# EAGLE board Circuit_board_PCB_(1.2.4)_stage_1_version_2_v4 (EAGLE 9.7.0)
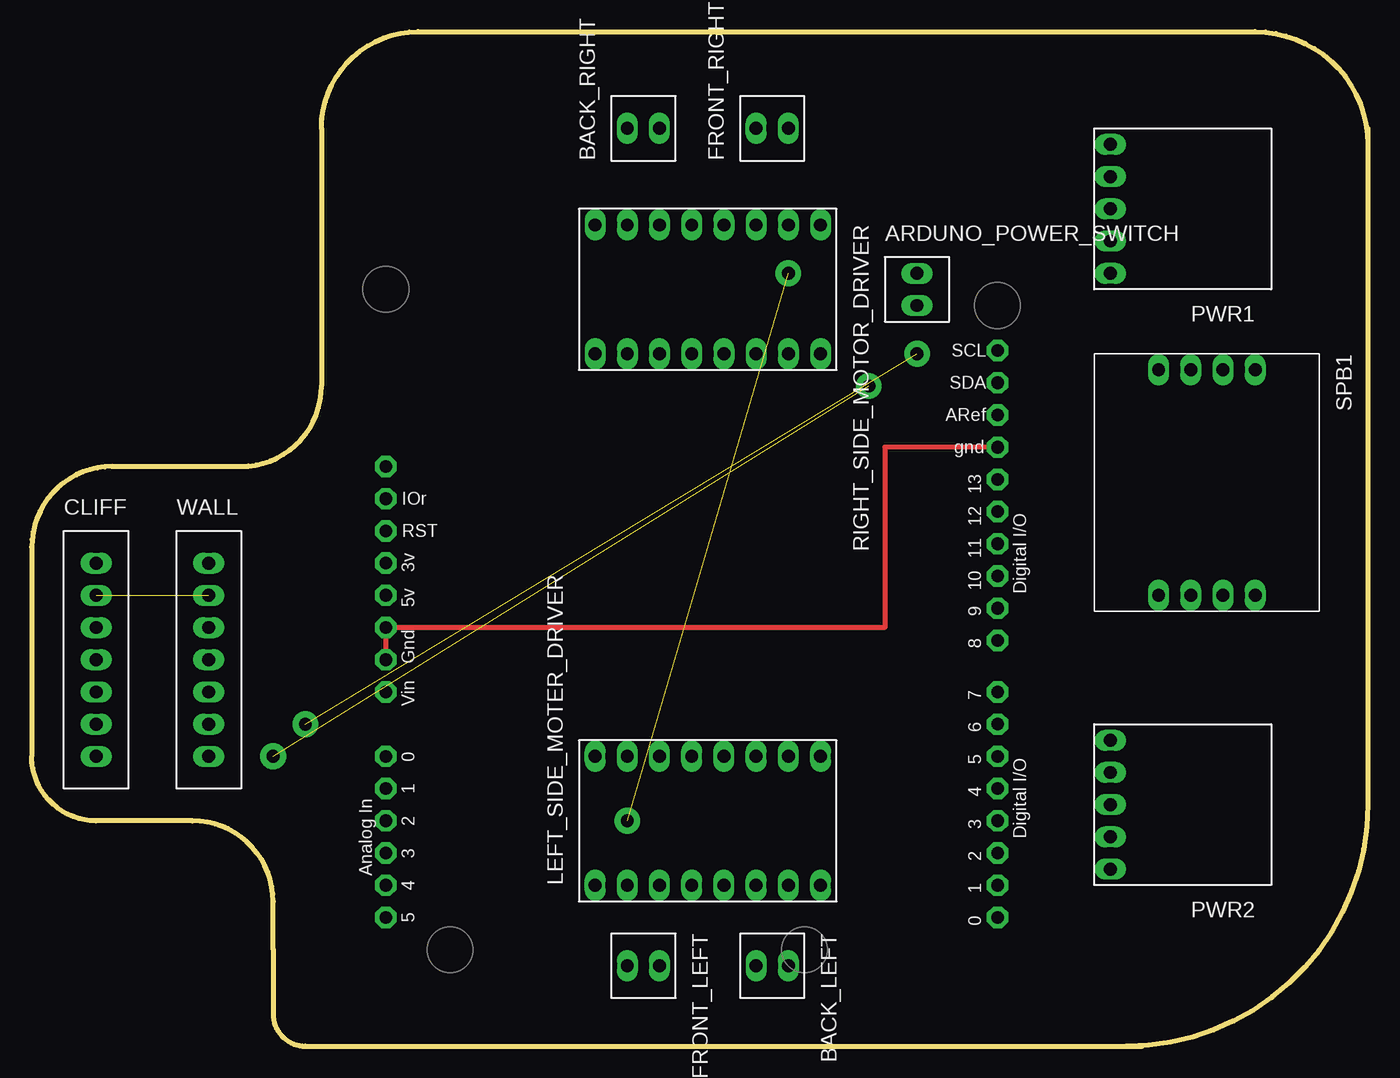
[diagram p0: board, top side]
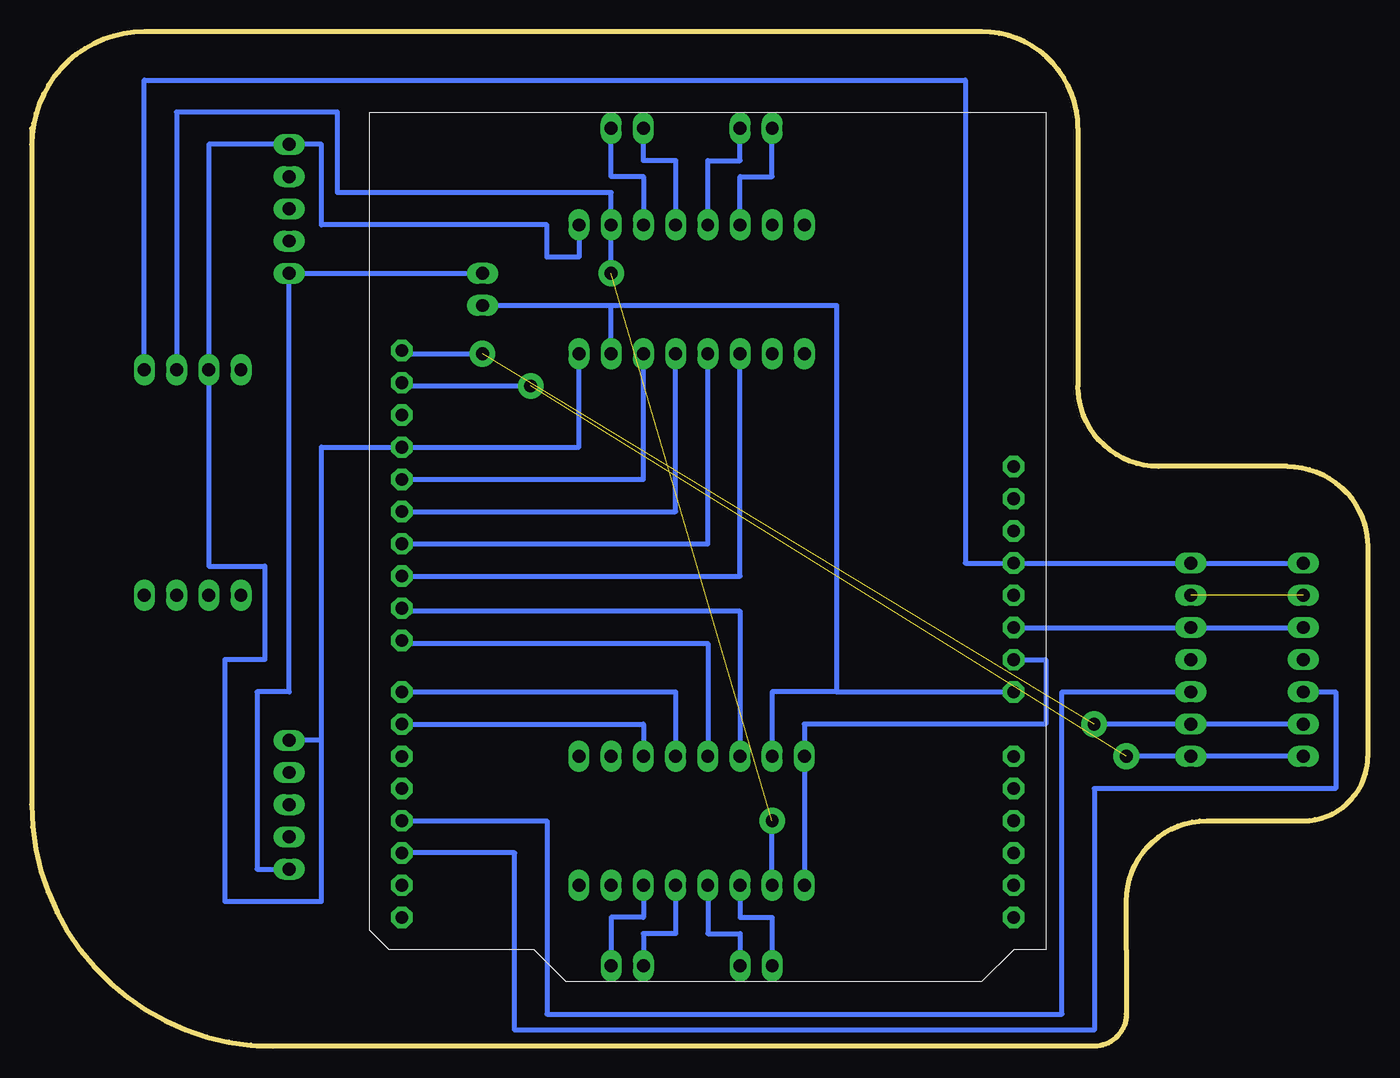
[diagram p1: board, bottom side, seen from below]

Size 105.41 x 80.01 mm. Coordinates in mm from the lower left corner, seen from the top.
Outline: 86.36,0 21.59,0 arc-90 19.05,2.54 19.05,7.62 19.05,11.43 arc90 12.7,17.78 5.08,17.78 arc-90 0,22.86 0,39.37 arc-90 6.35,45.72 16.51,45.72 arc90 22.86,52.07 22.86,72.39 arc-90 30.48,80.01 96.52,80.01 arc-90 105.41,71.12
Outline: 86.36,0 87.63,0
Outline: 105.41,72.39 105.41,71.12
Outline: 105.41,71.12 105.41,19.05 arc-90 86.36,0
Copper layers (1*16): Top 0.035mm / dielectric 1.5mm / Bottom 0.035mm
Design rules "OthermillDRC_1_32_v2": minimum track width 8mil, minimum drill 0.8mm, track to track 0.794003125mm, track to pad 0.794003125mm, pad to pad 0.794003125mm, via to via 0.794003125mm, smd to smd 0mil, copper to edge 0mil, drill to drill 1mil, minimum pad ring 10mil, minimum via ring 10mil, stop-mask expansion 1mil, vias tented up to drill 30mil, thermal gap 10mil

## Footprints (pad centres in the part's own frame; a part is rotated, then mirrored left to right if it is on the bottom)
MOTOR_OUTPUT_PINS = drill 1.016 pad 1.651 long: 1 0,1.27; 2 0,-1.27
DISTANCE_SENS_OUT = drill 1.016 pad 1.651 long: 1 0,7.62; 2 0,5.08; 3 0,2.54; 4 0,0; 5 0,-2.54; 6 0,-5.08; 7 0,-7.62
MOTOR_DRIVER = drill 1.016 pad 1.651 long: 1 -5.08,8.89; 2 -5.08,6.35; 3 -5.08,3.81; 4 -5.08,1.27; 5 -5.08,-1.27; 6 -5.08,-3.81; 7 -5.08,-6.35; 8 -5.08,-8.89; 9 5.08,8.89; 10 5.08,6.35; 11 5.08,3.81; 12 5.08,1.27; 13 5.08,-1.27; 14 5.08,-3.81; 15 5.08,-6.35; 16 5.08,-8.89
MICRO-USB_ADAPTER = drill 1.016 pad 1.651 long: 1 6.35,5.08; 2 6.35,2.54; 3 6.35,0; 4 6.35,-2.54; 5 6.35,-5.08
ADAFRUIT-SOFT-POWER-BUTTON_FOOTPRINT = drill 1.016 pad 1.651 long: 1 8.89,3.81; 2\ 8.89,1.27; 3 8.89,-1.27; 4 8.89,-3.81; 5 -8.89,3.81; 6 -8.89,1.27; 7 -8.89,-1.27; 8 -8.89,-3.81
ARDUINOR3-BPLACE = drill 1 pad 1.676 octagon: 3V 35.56,2.54; 5V 38.1,2.54; A0 50.8,2.54; A1 53.34,2.54; A2 55.88,2.54; A3 58.42,2.54; A4 60.96,2.54; A5 63.5,2.54; AREF 23.876,50.8; D0 63.5,50.8; D1 60.96,50.8; D2 58.42,50.8; D3 55.88,50.8; D4 53.34,50.8; D5 50.8,50.8; D6 48.26,50.8; D7 45.72,50.8; D8 41.656,50.8; D9 39.116,50.8; D10 36.576,50.8; D11 34.036,50.8; D12 31.496,50.8; D13 28.956,50.8; GND 26.416,50.8; GND1 43.18,2.54; GND2 40.64,2.54; IOREF 30.48,2.54; RESERVED 27.94,2.54; RESET 33.02,2.54; SCL 18.796,50.8; SDA 21.336,50.8; VIN 45.72,2.54

## Placement (x,y rotation side)
ARDUNO_POWER_SWITCH  MOTOR_OUTPUT_PINS  [MOTOR_OUTPUT_PINS]  69.85,59.69 0 top
BACK_LEFT  MOTOR_OUTPUT_PINS  [MOTOR_OUTPUT_PINS]  58.42,6.35 270 top
BACK_RIGHT  MOTOR_OUTPUT_PINS  [MOTOR_OUTPUT_PINS]  48.26,72.39 90 top
CLIFF  DIST_SENS_OUTPUTPINS  [DISTANCE_SENS_OUT]  5.08,30.48 0 top
FRONT_LEFT  MOTOR_OUTPUT_PINS  [MOTOR_OUTPUT_PINS]  48.26,6.35 270 top
FRONT_RIGHT  MOTOR_OUTPUT_PINS  [MOTOR_OUTPUT_PINS]  58.42,72.39 90 top
LEFT_SIDE_MOTER_DRIVER  MOTOR_DRIVER  [MOTOR_DRIVER]  53.34,17.78 90 top
PWR1  MICRO-USB_ADAPTER  [MICRO-USB_ADAPTER]  91.44,66.04 180 top
PWR2  MICRO-USB_ADAPTER  [MICRO-USB_ADAPTER]  91.44,19.05 180 top
RIGHT_SIDE_MOTOR_DRIVER  MOTOR_DRIVER  [MOTOR_DRIVER]  53.34,59.69 270 top
SPB1  SOFT-POWER_BUTTON  [ADAFRUIT-SOFT-POWER-BUTTON_FOOTPRINT]  92.71,44.45 270 top
U2  ARDUINOR3-BPLACE  [ARDUINOR3-BPLACE]  25.4,73.66 270 top
WALL  DIST_SENS_OUTPUTPINS  [DISTANCE_SENS_OUT]  13.97,30.48 0 top

## Library data of the parts
ARDUNO_POWER_SWITCH BACK_LEFT BACK_RIGHT FRONT_LEFT FRONT_RIGHT = motor_output_pins
CLIFF WALL = dist_sens_output_pins
LEFT_SIDE_MOTER_DRIVER RIGHT_SIDE_MOTOR_DRIVER = MOTOR_DRIVER
PWR1 PWR2 = mico-usb adapter
SPB1 = Soft-power-button library
U2 = adafruit

## Nets
2V8: CLIFF.2 WALL.2
5V: U2.5V
+3.3V: CLIFF.1 SPB1.5 U2.3V WALL.1
+5V: ARDUNO_POWER_SWITCH.2 LEFT_SIDE_MOTER_DRIVER.10 RIGHT_SIDE_MOTOR_DRIVER.10 U2.VIN
G: SPB1.3
GND: CLIFF.3 LEFT_SIDE_MOTER_DRIVER.1 LEFT_SIDE_MOTER_DRIVER.9 PWR1.5 PWR2.5 RIGHT_SIDE_MOTOR_DRIVER.1 RIGHT_SIDE_MOTOR_DRIVER.9 SPB1.7 U2.GND U2.GND1 U2.GND2 WALL.3
N$1: FRONT_RIGHT.2 RIGHT_SIDE_MOTOR_DRIVER.3
N$2: FRONT_RIGHT.1 RIGHT_SIDE_MOTOR_DRIVER.4
N$3: BACK_RIGHT.2 RIGHT_SIDE_MOTOR_DRIVER.5
N$4: BACK_RIGHT.1 RIGHT_SIDE_MOTOR_DRIVER.6
N$5: FRONT_LEFT.2 LEFT_SIDE_MOTER_DRIVER.3
N$6: FRONT_LEFT.1 LEFT_SIDE_MOTER_DRIVER.4
N$7: BACK_LEFT.2 LEFT_SIDE_MOTER_DRIVER.5
N$8: BACK_LEFT.1 LEFT_SIDE_MOTER_DRIVER.6
N$9: RIGHT_SIDE_MOTOR_DRIVER.11 U2.D13
N$10: RIGHT_SIDE_MOTOR_DRIVER.12 U2.D12
N$11: RIGHT_SIDE_MOTOR_DRIVER.13 U2.D11
N$12: RIGHT_SIDE_MOTOR_DRIVER.14 U2.D10
N$13: LEFT_SIDE_MOTER_DRIVER.11 U2.D9
N$14: LEFT_SIDE_MOTER_DRIVER.12 U2.D8
N$15: LEFT_SIDE_MOTER_DRIVER.13 U2.D7
N$16: LEFT_SIDE_MOTER_DRIVER.14 U2.D6
N$17: CLIFF.6 U2.SCL WALL.6
N$18: CLIFF.7 U2.SDA WALL.7
N$19: ARDUNO_POWER_SWITCH.1 PWR1.1 PWR2.1
N$20: CLIFF.5 U2.D2
N$21: U2.D3 WALL.5
N$22: LEFT_SIDE_MOTER_DRIVER.2 RIGHT_SIDE_MOTOR_DRIVER.2 SPB1.6

## Tracks (layer width: path | path; a pad name or v marks a point on that pad's centre or on a via)
2V8  (1 unrouted)
+3.3V
  Bottom 0.406: CLIFF.1 WALL.1 U2.3V 31.75,38.1 31.75,76.2 96.52,76.2 SPB1.5
+5V
  Bottom 0.406: 41.91,27.94 U2.VIN | 41.91,27.94 46.99,27.94 LEFT_SIDE_MOTER_DRIVER.10 | ARDUNO_POWER_SWITCH.2 59.69,58.42 | RIGHT_SIDE_MOTOR_DRIVER.10 59.69,58.42 | 59.69,58.42 41.91,58.42 41.91,27.94
GND
  Top 0.406: U2.GND 67.31,47.24 67.31,33.02 U2.GND2 U2.GND1
  Bottom 0.406: CLIFF.3 WALL.3 U2.GND2 | LEFT_SIDE_MOTER_DRIVER.1 LEFT_SIDE_MOTER_DRIVER.9 44.45,25.4 25.4,25.4 25.4,30.48 U2.GND1 | 82.55,24.13 PWR2.5 | 82.55,24.13 82.55,47.24 U2.GND 62.23,47.24 RIGHT_SIDE_MOTOR_DRIVER.9 | 82.55,24.13 82.55,11.43 90.17,11.43 90.17,30.48 87.03,30.48 87.03,37.87 91.44,37.87 SPB1.7 91.44,71.12 PWR1.5 82.55,71.12 82.55,64.77 64.77,64.77 64.77,62.23 62.23,62.23 RIGHT_SIDE_MOTOR_DRIVER.1
N$1
  Bottom 0.406: RIGHT_SIDE_MOTOR_DRIVER.3 57.15,68.58 59.69,68.58 FRONT_RIGHT.2
N$2
  Bottom 0.406: RIGHT_SIDE_MOTOR_DRIVER.4 54.61,69.85 57.15,69.85 FRONT_RIGHT.1
N$3
  Bottom 0.406: RIGHT_SIDE_MOTOR_DRIVER.5 52.07,69.85 49.53,69.85 BACK_RIGHT.2
N$4
  Bottom 0.406: RIGHT_SIDE_MOTOR_DRIVER.6 49.53,68.58 46.99,68.58 BACK_RIGHT.1
N$5
  Bottom 0.406: LEFT_SIDE_MOTER_DRIVER.3 49.53,10.16 46.99,10.16 FRONT_LEFT.2
N$6
  Bottom 0.406: LEFT_SIDE_MOTER_DRIVER.4 52.07,8.89 49.53,8.89 FRONT_LEFT.1
N$7
  Bottom 0.406: LEFT_SIDE_MOTER_DRIVER.5 54.61,8.89 57.15,8.89 BACK_LEFT.2
N$8
  Bottom 0.406: LEFT_SIDE_MOTER_DRIVER.6 57.15,10.16 59.69,10.16 BACK_LEFT.1
N$9
  Bottom 0.406: U2.D13 57.15,44.7 RIGHT_SIDE_MOTOR_DRIVER.11
N$10
  Bottom 0.406: U2.D12 54.61,42.16 RIGHT_SIDE_MOTOR_DRIVER.12
N$11
  Bottom 0.406: U2.D11 52.07,39.62 RIGHT_SIDE_MOTOR_DRIVER.13
N$12
  Bottom 0.406: U2.D10 49.53,37.08 RIGHT_SIDE_MOTOR_DRIVER.14
N$13
  Bottom 0.406: U2.D9 76.2,34.29 49.53,34.29 LEFT_SIDE_MOTER_DRIVER.11
N$14
  Bottom 0.406: U2.D8 76.2,31.75 52.07,31.75 LEFT_SIDE_MOTER_DRIVER.12
N$15
  Bottom 0.406: U2.D7 54.61,27.94 LEFT_SIDE_MOTER_DRIVER.13
N$16
  Bottom 0.406: U2.D6 57.15,25.4 LEFT_SIDE_MOTER_DRIVER.14
N$17  (via drill 1.02 pad 2.03)  (1 unrouted)
  Bottom 0.406: CLIFF.6 WALL.6 v21.59,25.4 | U2.SCL 76.2,54.61 v69.85,54.61
N$18  (via drill 1.02 pad 2.03)  (1 unrouted)
  Bottom 0.406: CLIFF.7 WALL.7 v19.05,22.86 | U2.SDA 76.2,52.07 v66.04,52.07
N$19
  Bottom 0.406: ARDUNO_POWER_SWITCH.1 PWR1.1 85.09,27.94 87.63,27.94 87.63,13.97 PWR2.1
N$20
  Bottom 0.406: CLIFF.5 2.54,27.94 2.54,20.32 21.59,20.32 21.59,1.27 67.31,1.27 67.31,15.24 U2.D2
N$21
  Bottom 0.406: U2.D3 64.77,17.78 64.77,2.54 24.13,2.54 24.13,27.94 WALL.5
N$22  (via drill 1.02 pad 2.03)  (1 unrouted)
  Bottom 0.406: SPB1.6 93.98,73.66 81.28,73.66 81.28,67.31 59.69,67.31 RIGHT_SIDE_MOTOR_DRIVER.2 v59.69,60.96 | LEFT_SIDE_MOTER_DRIVER.2 v46.99,17.78